# EAGLE board encoder_tle (EAGLE 9.6.2)
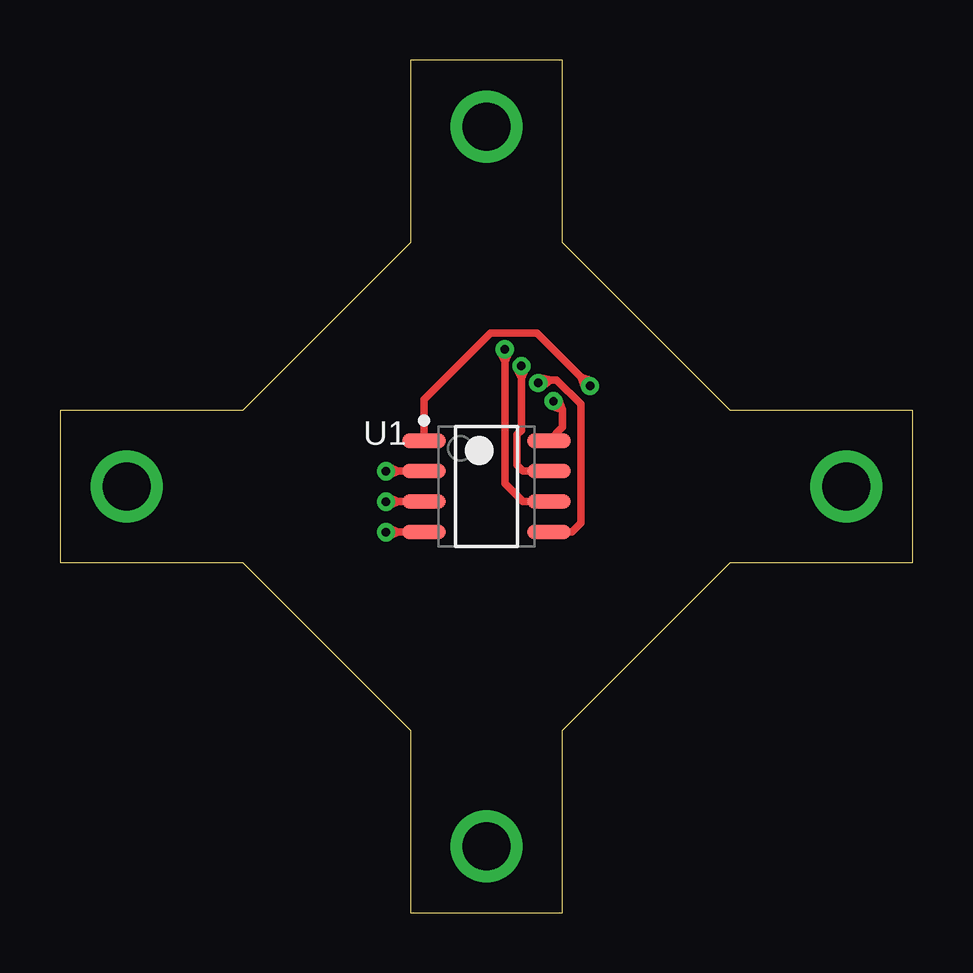
[diagram p0: board, top side]
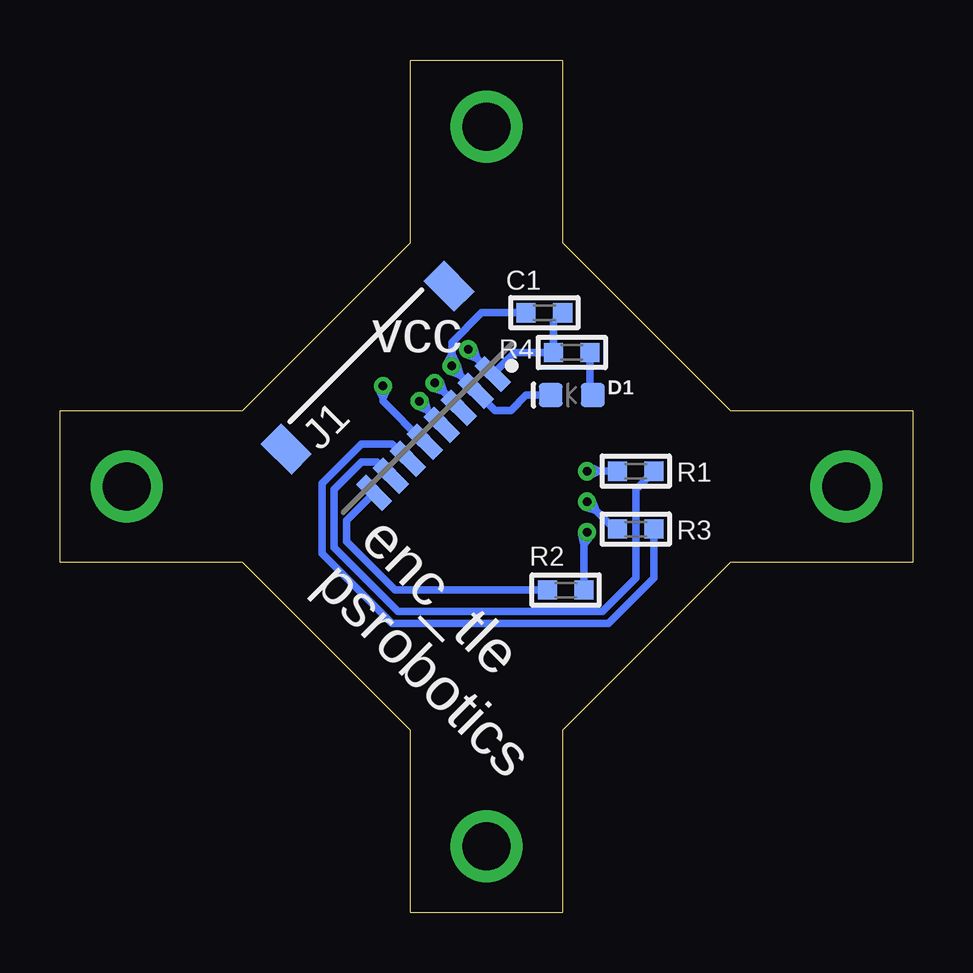
[diagram p1: board, bottom side, seen from below]

Size 35.56 x 35.56 mm. Coordinates in mm from the lower left corner, seen from the top.
Outline: 0,20.96 0,14.61 7.62,14.61 14.61,7.62 14.61,0 20.96,0 20.96,7.62 27.94,14.61 35.56,14.61 35.56,20.96 27.94,20.96 20.96,27.94 20.96,35.56 14.61,35.56 14.61,27.94 7.62,20.96 0,20.96
Copper layers (1*16): Top 0.035mm / dielectric 1.5mm / Bottom 0.035mm
Design rules "default *": minimum track width 6mil, minimum drill 0.35mm, track to track 6mil, track to pad 6mil, pad to pad 6mil, via to via 6mil, smd to smd 6mil, copper to edge 40mil, drill to drill 6mil, minimum pad ring 10mil, minimum via ring 8mil, stop-mask expansion 4mil, vias tented up to drill 8mil, thermal gap 10mil

## Footprints (pad centres in the part's own frame; a part is rotated, then mirrored left to right if it is on the bottom)
C0603 = smd 0.8 x 0.8: 1 -0.762,0; 2 0.762,0
LED-0603 = smd 1 x 1: A -0.877,0; C 0.877,0
JST_SM08B-SRSS-TB(LF)(SN) = smd 0.6 x 1.55: 1 -3.5,4.775; 2 -2.5,4.775; 3 -1.5,4.775; 4 -0.5,4.775; 5 0.5,4.775; 6 1.5,4.775; 7 2.5,4.775; 8 3.5,4.775 | smd 1.2 x 1.8: P1 -4.8,0.9; P2 4.8,0.9
R0603 = smd 0.8 x 0.8: 1 -0.762,0; 2 0.762,0
INFINEON_TLE5012B_E1000_1 = smd 1.8 x 0.6: 1 -2.6,1.905; 2 -2.6,0.635; 3 -2.6,-0.635; 4 -2.6,-1.905; 5 2.6,-1.905; 6 2.6,-0.635; 7 2.6,0.635; 8 2.6,1.905

## Placement (x,y rotation side)
C1  100nf  [C0603]  15.37,25.02 180 bottom
D1  BLUE  [LED-0603]  14.22,21.59 180 bottom
J1  SM08B-SRSS-TB(LF)(SN)  [JST_SM08B-SRSS-TB(LF)(SN)]  23.37,23.37 225 bottom
R1  100  [R0603]  11.56,18.42 180 bottom
R2  470  [R0603]  14.48,13.46 0 bottom
R3  100  [R0603]  11.56,16 180 bottom
R4  300  [R0603]  14.22,23.37 0 bottom
U1  INFINEON_TLE5012B_E1000INFINEON_TLE5012B_E1000_0_1  [INFINEON_TLE5012B_E1000_1]  17.78,17.78 0 top

## Library data of the parts
C1 R1-R4 = rc-master-smd
D1 = SparkFun-LED; PROD_ID: DIO-08575
J1 = SM08B-SRSS-TB_LF__SN_; AVAILABILITY: Warning; DESCRIPTION: Connector Header Surface Mount, Right Angle 8 position 0.039 (1.00mm); MF: JST Sales; MP: SM08B-SRSS-TB(LF)(SN); PACKAGE: None; PRICE: None
U1 = Infineon - TLE5012B E1000; CIIVA_IDS: 7675067; COMPONENT_LINK_1_DESCRIPTION: Manufacturer URL; COMPONENT_LINK_1_URL: http://www.infineon.com/; COMPONENT_LINK_3_DESCRIPTION: Package Specification; COMPONENT_LINK_3_URL: http://www.infineon.com/dgdl/TLE7259-2GE_DS_rev12.pdf?folderId=db3a3043163797a6011666d32a0c0de1&fileId=db3a3043163797a6011666d4dbb80de2&location=en.Products.Automotive_ICs.Automotive_Transceivers.LIN_Transceivers.DATASHEET.TLE7259-2GE_DS_rev12.pdf; DATASHEET: http://www.infineon.com/dgdl/TLE5012B_FDS_Rev1+1.pdf?folderId=db3a30431ce5fb52011d3dd6e8012582&fileId=db3a304334fac4c601350f31c43c433f; DATASHEET_VERSION: Rev. 1.1; FOOTPRINT_VARIANT_NAME_0: Level C; FOOTPRINT_VARIANT_NAME_1: Level B; FOOTPRINT_VARIANT_NAME_2: Level A; GREEN: true; HALOGEN_FREE: available; IMPORTED: yes; IMPORTED_FROM: vault; IMPORT_TS: 1521845141; INTERFACE: SPI, IIF; MF: Infineon; MOUNTING_TECHNOLOGY: Surface Mount; MPN: TLE5012B E1000; PACKAGE: PG-DSO-8-16; PACKAGE_DESCRIPTION: 8-Pin Plastic (Green) Dual Small Outline Package, 4.9 x 3.9 mm Body, 1.27 mm Pitch; PACKAGE_VERSION: Mar-07; PACKING: Reel; PIN_0_0_1_INSIDE_EDGE: clock; PREFIX: U; RELEASE_DATE: 1409234812; VAULT_GUID: 0753320D-5F07-4E61-B6F4-8D26939B768A; VAULT_REVISION: 3B46AF6C-B76E-4A0E-8D2A-8CD1C2A5AA45

## Nets
CSQ: J1.6 R3.1
DATA: J1.8 R2.1
GND: C1.2 D1.C J1.2 U1.7
IFA: J1.3 U1.5
IFB: J1.4 U1.8
IFC: J1.5 U1.1
N$1: D1.A R4.2
N$2: R3.2 U1.3
N$3: R2.2 U1.4
N$4: R1.2 U1.2
SCK: J1.7 R1.1
VCC: C1.1 J1.1 R4.1 U1.6

## Tracks (layer width: path | path; a pad name or v marks a point on that pad's centre or on a via)
CSQ
  Bottom 0.305: J1.6 21.09,18.93 21.72,19.56 22.99,19.56 24.64,17.91 24.64,14.99 21.72,12.07 12.69,12.07 10.8,13.96 R3.1
DATA
  Bottom 0.305: J1.8 23.62,16.36 23.62,15.5 21.59,13.46 R2.1
GND  (via drill 0.35)
  Top 0.305: v19.23,22.8 19.23,22.28 | 19.23,22.28 19.23,20.12 19.05,19.94 19.05,18.67 19.3,18.42 U1.7 | 19.23,22.28 19.44,22.71 v19.23,22.8 | 19.23,22.28 19.03,22.71 v19.23,22.8
  Bottom 0.305: D1.C 16.13,21.59 16.76,20.96 17.42,20.96 J1.2 18.88,22.41 | 18.88,22.41 19.23,22.77 | 19.23,22.77 v19.23,22.8 | 19.23,22.77 19.23,22.78 19.23,23.33 | 19.23,23.33 19.23,23.78 17.98,25.02 C1.2 | 18.88,22.41 19.32,22.6 v19.23,22.8 | 18.88,22.41 19.02,22.87 v19.23,22.8 | 19.23,23.33 19.03,22.9 v19.23,22.8 | 19.23,23.33 19.44,22.9 v19.23,22.8
IFA  (via drill 0.35)
  Top 0.305: U1.5 21.34,15.88 21.72,16.26 21.72,21.21 20.7,22.23 20.45,22.23 | 20.45,22.23 20.07,22.23 v19.94,22.1 | 20.45,22.23 19.98,22.32 v19.94,22.1 | 20.45,22.23 20.08,21.92 v19.94,22.1
  Bottom 0.305: J1.3 18.93,21.09 19.57,21.73 | v19.94,22.1 19.57,21.73 | 19.57,21.73 20.01,21.89 v19.94,22.1 | 19.57,21.73 19.73,22.17 v19.94,22.1
IFB  (via drill 0.35)
  Top 0.305: U1.8 20.96,20.26 20.96,20.96 20.95,20.96 | 20.95,20.96 v20.57,21.34 | 20.95,20.96 20.79,21.41 v20.57,21.34 | 20.95,20.96 20.5,21.12 v20.57,21.34
  Bottom 0.305: v20.57,21.34 20.6,21.31 20.23,20.94 | 20.23,20.94 J1.4 | 20.23,20.94 20.66,21.13 v20.57,21.34 | 20.23,20.94 20.36,21.4 v20.57,21.34
IFC  (via drill 0.35)
  Top 0.305: 21.73,22.34 19.89,24.18 17.96,24.18 15.18,21.4 U1.1 | 21.73,22.34 v22.1,21.97 | 21.73,22.34 21.89,21.9 v22.1,21.97 | 21.73,22.34 22.17,22.18 v22.1,21.97
  Bottom 0.305: v22.1,21.97 22.1,21.45 | 22.1,21.45 22.1,21.34 20.4,19.64 J1.5 | 22.1,21.45 22.3,21.87 v22.1,21.97 | 22.1,21.45 21.89,21.87 v22.1,21.97
N$1
  Bottom 0.305: R4.2 13.46,21.71 D1.A
N$2  (via drill 0.35)
  Top 0.305: U1.3 14.11,17.14 | 14.11,17.14 v13.59,17.14 | 14.11,17.14 13.69,17.35 v13.59,17.14 | 14.11,17.14 13.69,16.94 v13.59,17.14
  Bottom 0.305: v13.59,17.14 13.22,16.77 | 13.22,16.77 12.45,16 R3.2 | 13.22,16.77 13.66,16.93 v13.59,17.14 | 13.22,16.77 13.38,17.22 v13.59,17.14
N$3  (via drill 0.35)
  Top 0.305: U1.4 14.11,15.88 | 14.11,15.88 v13.59,15.88 | 14.11,15.88 13.69,16.08 v13.59,15.88 | 14.11,15.88 13.69,15.67 v13.59,15.88
  Bottom 0.305: v13.59,15.88 13.72,15.75 13.72,15.37 | 13.72,15.37 R2.2 | 13.72,15.37 13.81,15.83 v13.59,15.88 | 13.72,15.37 13.42,15.73 v13.59,15.88
N$4  (via drill 0.35)
  Top 0.305: U1.2 14.11,18.42 | 14.11,18.42 v13.59,18.42 | 14.11,18.42 13.69,18.62 v13.59,18.42 | 14.11,18.42 13.69,18.21 v13.59,18.42
  Bottom 0.305: v13.59,18.42 13.06,18.42 | 13.06,18.42 R1.2 | 13.06,18.42 13.49,18.21 v13.59,18.42 | 13.06,18.42 13.49,18.62 v13.59,18.42
N$5  (via drill 2)
  other vias: 2.78,17.78
N$6  (via drill 2)
  other vias: 17.78,2.78
N$7  (via drill 2)
  other vias: 32.78,17.78
N$8  (via drill 2)
  other vias: 17.78,32.78
SCK
  Bottom 0.305: J1.7 22.33,18.8 22.99,18.8 24.13,17.65 24.13,15.24 21.46,12.57 12.95,12.57 11.56,13.97 11.56,17.65 R1.1
VCC  (via drill 0.35)
  Top 0.305: v18.54,23.5 18.54,22.97 | 18.54,22.97 18.54,17.91 19.3,17.14 U1.6 | 18.54,22.97 18.75,23.4 v18.54,23.5 | 18.54,22.97 18.34,23.4 v18.54,23.5
  Bottom 0.305: 18.17,23.12 J1.1 16.62,23.37 R4.1 14.99,24.64 C1.1 | 18.17,23.12 v18.54,23.49 v18.54,23.5 | 18.17,23.12 18.62,23.28 v18.54,23.5 | 18.17,23.12 18.33,23.57 v18.54,23.5

## Text on the board
bPlace: vcc | enc_tle / psrobotics